# Altium PCB PiMX8MP_r0.3.PcbDoc (part 9 of 10)
Units mm, origin at the board's own origin, x right, y up, seen from the top; angles counter-clockwise.
Board outline 55 x 40 mm, 10 copper layers (Top Layer, Layer 1, Layer 2, Layer 3, Layer 4, Layer 5, Layer 6, Layer 7, Layer 8, Bottom Layer), stack 1.472 mm thick; 545 components, 477 nets, 2606 pads, 2278 vias.
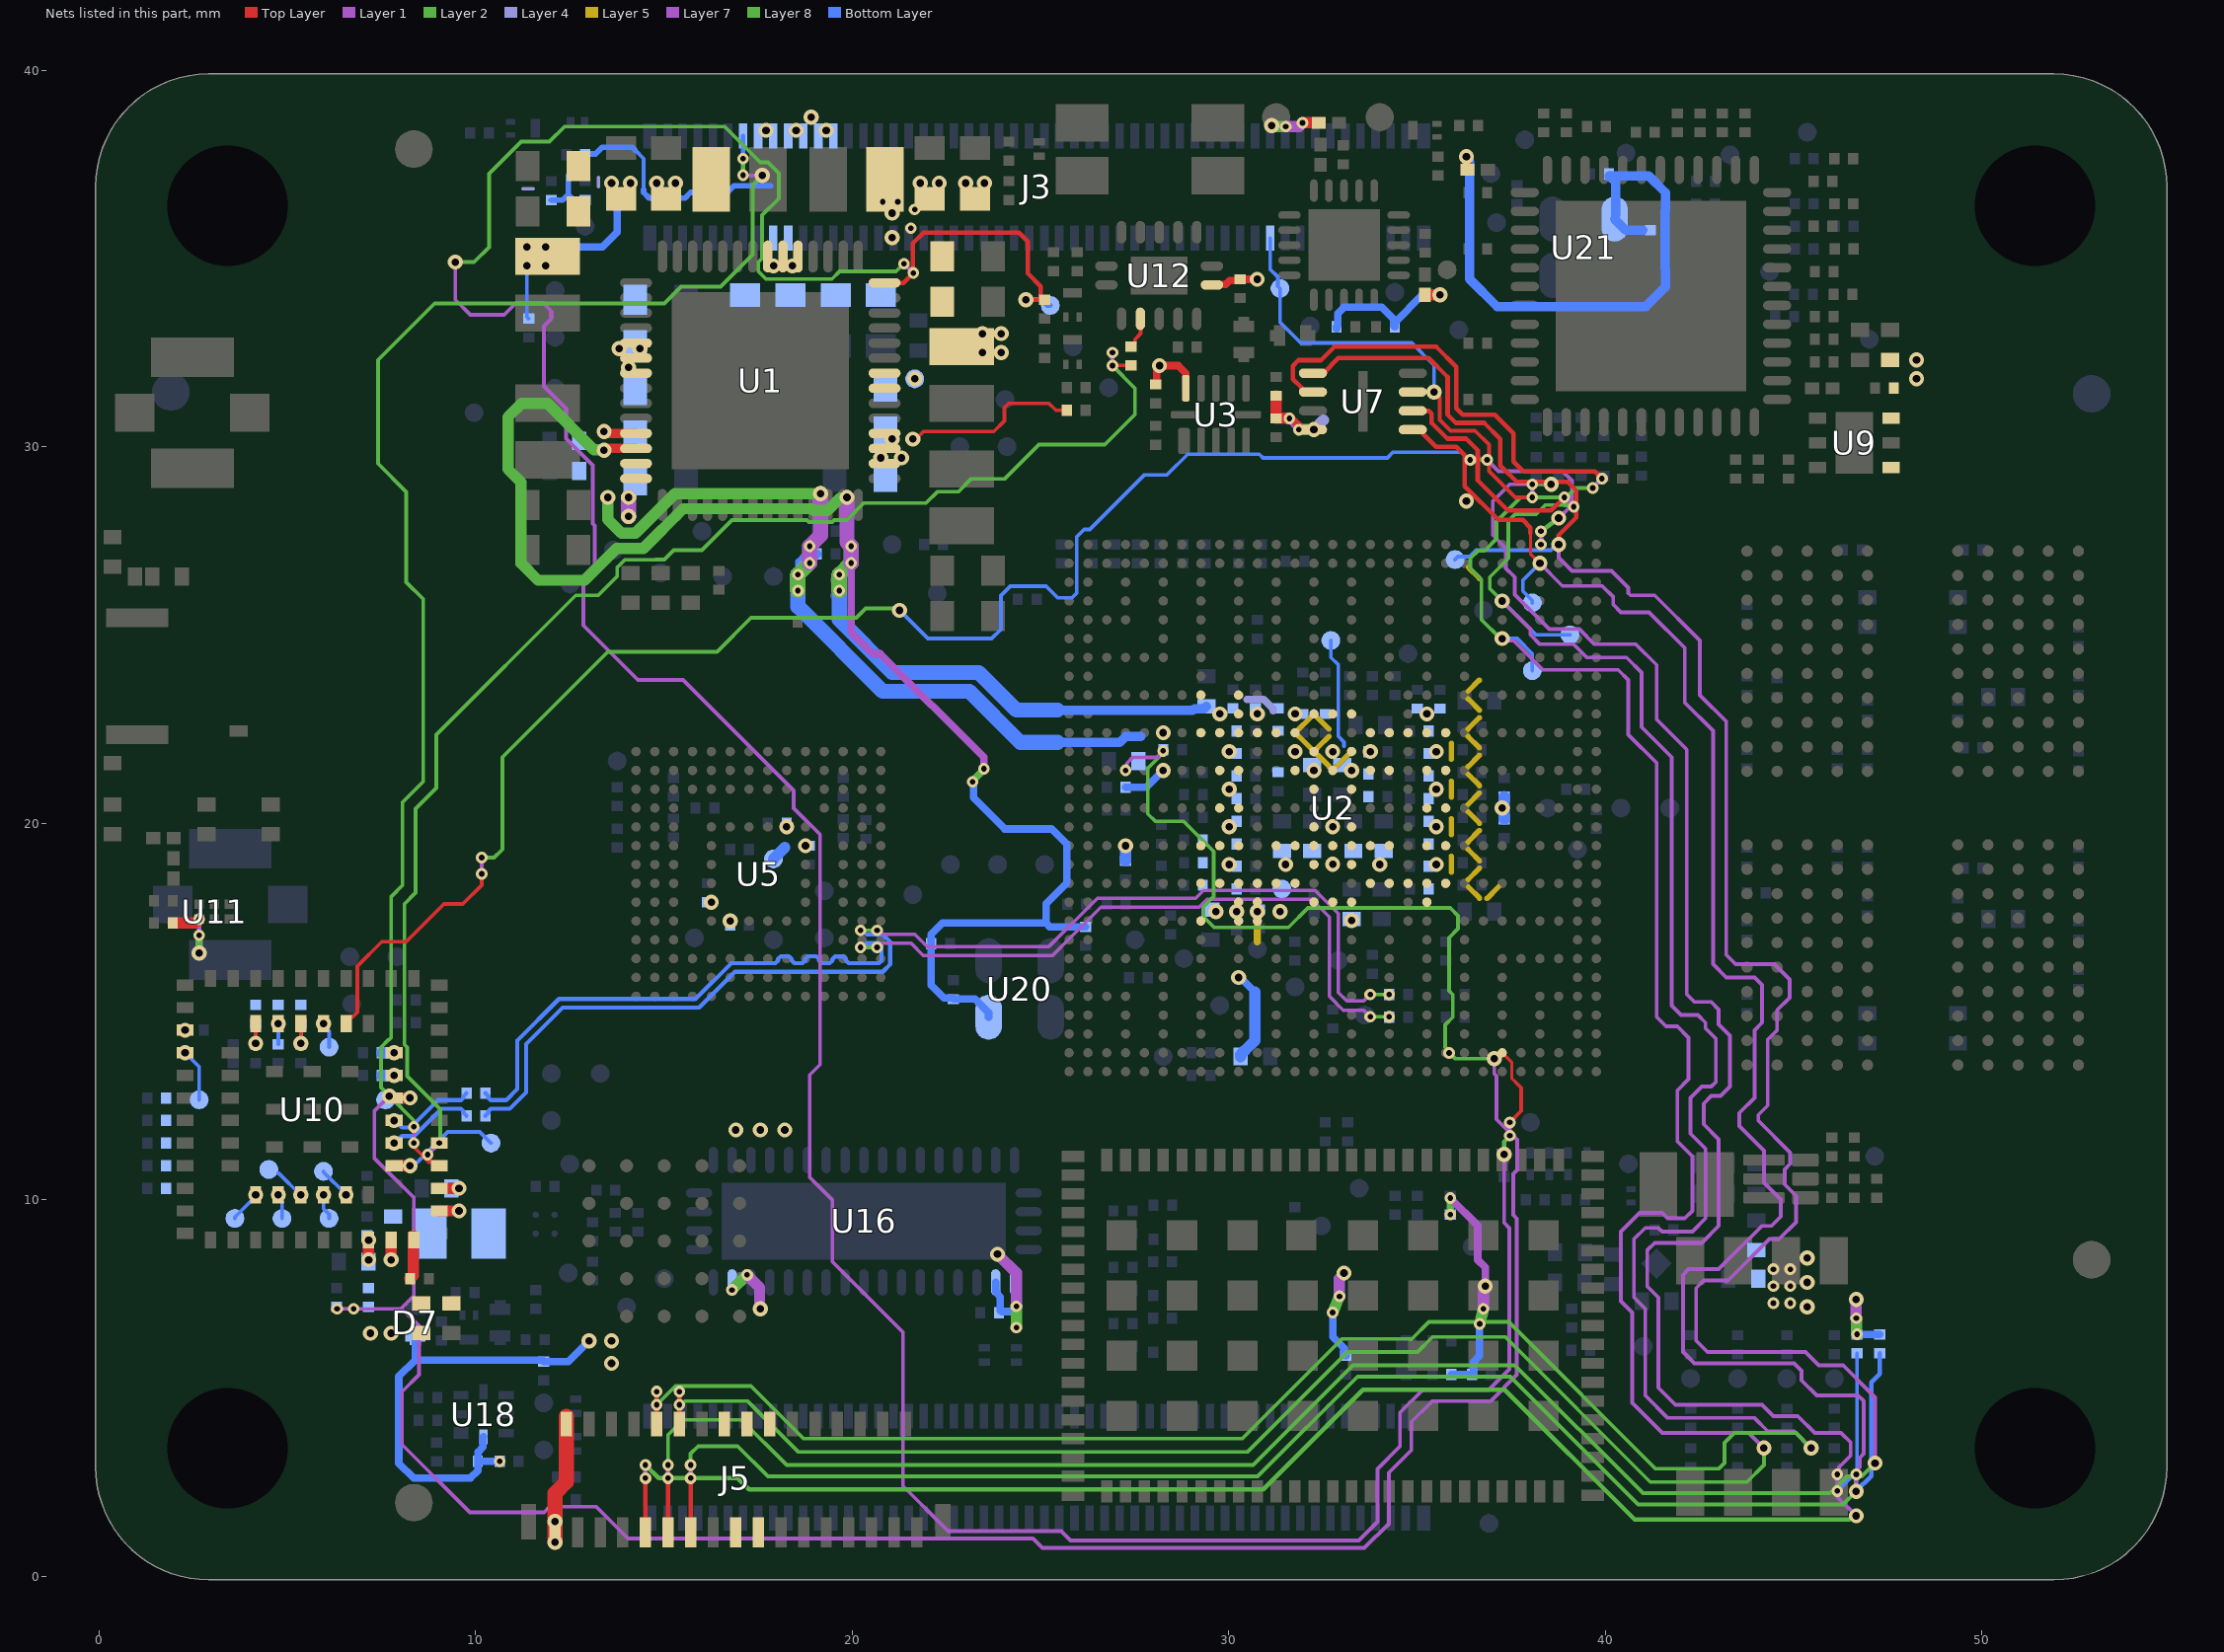
[diagram p17: the nets of this part, all layers, seen from the top]

## Via types
v1: diameter 0.4, hole 0.2, Top Layer to Bottom Layer, tented both sides, 946 vias
v2: diameter 0.31, hole 0.15, Top Layer to Layer 1, tented both sides, 321 vias
v3: diameter 0.31, hole 0.15, Layer 8 to Bottom Layer, tented both sides, 315 vias
v4: diameter 0.31, hole 0.15, Layer 1 to Layer 2, tented both sides, 257 vias
v5: diameter 0.31, hole 0.15, Layer 7 to Layer 8, tented both sides, 198 vias
v6: diameter 0.4, hole 0.2, Layer 2 to Layer 7, tented both sides, 169 vias
v7: diameter 0.31, hole 0.15, Top Layer to Layer 1, tented top, 72 vias

## Nets (pads, with @x,y where several pads share a name; then routed paths per layer and width w, separated by ;. In a path a pad name is that pad's centre, name@x,y a point inside that pad or via, vN(x,y) a via of type N, cw(c..) or ccw(c..) an arc to the next point about the centre after c; other vN are vias at no path point) (continued)
VCC3.3_SYS: C3.1 C4.1 C28.1 C54.1 C55.1 C56.1 C57.1 C105.1 C108.1 C137.1 C138.1 C139.1 C140.1 C148.1 C160.1 C167.1 C175.1 C179.1 C192.1 C195.1 J3.84 J3.86 J5.32 J5.33 L2.2 L7.2 L11.1 L12.1 R37.2 R38.2 R40.1 R62.2 R63.2 R64.2 R80.2 R126.2 R155.1 R162.2 R163.2 R165.2 R175.2 R176.2 R186.1 TP1.TP TP43.TP U1.21 U1.22 U2.J14 U2.U24 U2.Y10 U3.11 U5.E6 U5.F5 U5.J10 U5.K9 U7.8 U9.4 U9.6 U10.3 U10.49 U11.4 U12.14 U16.1 U16.2 U16.16 U21.4 | length 69.7
  Top Layer w0.2: C108.1@28.062,31.654 28.088,31.68 28.088,32.026 28.162,32.1 v1(28.162,32.154) 28.662,32.154 28.862,31.954 U3.11@28.862,31.554 ; U12.14@29.553,34.299 29.562,34.308 29.916,34.308 30.025,34.417 30.271,34.417 C195.1@30.303,34.449 v1(30.756,34.449) ; v2(31.612,30.754) 31.633,30.733 31.695,30.733 31.974,30.454 U7.8@32.237,30.454
  Top Layer w0.25: v1(36.312,37.704) 36.327,37.689 36.327,37.369 L7.2@36.342,37.354
  Top Layer w0.3: C167.1@1.962,17.354 2.562,17.354 v7(2.662,17.454) ; U10.3@9.037,10.304 v1(9.562,10.304) ; R63.2@31.262,31.354 C148.1@31.262,30.754 v2(31.612,30.754) ; v2(31.962,38.604) L12.1@32.392,38.604 ; L11.1@35.212,34.034 v1(35.612,34.034)
  Top Layer w0.4: v1(12.112,0.904) v1(12.112,1.454) 12.112,2.204 12.412,2.504 J5.32@12.412,4.254
  Layer 1 w0.12: v4(2.662,17.022) v7(2.662,17.454)
  Layer 1 w0.2: v2(31.612,30.754) v4(31.862,30.454)
  Layer 1 w0.3: v4(31.512,38.504) 31.514,38.506 31.861,38.506 31.959,38.604 v2(31.962,38.604)
  Layer 2 w0.2: v6(2.662,16.554) v4(2.662,17.022)
  Layer 2 w0.3: v6(31.142,38.53) 31.169,38.53 31.193,38.506 31.51,38.506 v4(31.512,38.504) ; v4(31.862,30.454) v6(32.262,30.454)
  Layer 4 w0.3: v6(32.262,30.454) 32.513,30.705
  Layer 5 w0.14: 31.862,22.309 32.162,22.009 ; 31.862,22.504 31.867,22.504 32.167,22.804 ; 32.357,22.004 32.662,22.309 ; 32.362,21.809 32.662,21.509 ; 32.362,22.799 32.662,22.499 ; 32.857,21.504 33.162,21.809 ; 35.912,18.696 35.912,19.12 ; 35.912,19.696 35.912,20.12 ; 35.912,20.696 35.912,21.12 ; 35.912,21.696 35.912,22.12 ; 36.357,18.504 36.657,18.804 ; 36.357,19.304 36.662,18.999 ; 36.357,19.504 36.657,19.804 ; 36.357,20.304 36.662,19.999 ; 36.357,20.504 36.657,20.804 ; 36.357,21.304 36.662,20.999 ; 36.357,21.504 36.657,21.804 ; 36.357,22.304 36.662,21.999 ; 36.357,22.504 36.657,22.804 ; 36.357,23.304 36.662,22.999 ; 36.357,23.504 36.657,23.804 ; 36.362,18.309 36.662,18.009 ; 36.362,26.799 36.662,26.499 ; 36.857,18.004 37.162,18.309
  Layer 5 w0.3: v1(33.262,17.414) v1@33.289,17.414
  Layer 7 w0.2: v5(35.887,10.044) 36.612,9.319 36.612,8.404 36.812,8.204 v6(36.812,7.704)
  Layer 7 w0.3: v5(17.212,8.004) 17.212,8.002 17.543,7.671 17.543,7.124 v6(17.562,7.104) ; v6(23.862,8.554) 24.362,8.054 v5(24.362,7.17) ; v5@32.941,7.463 32.941,7.906 33.062,8.027 v6(33.062,8.054) ; v5@36.762,7.134 36.762,7.627 36.812,7.677 v6(36.812,7.704) ; v5(46.662,6.854) v6(46.662,7.354)
  Layer 8 w0.2: v3(35.887,9.604) v5(35.887,10.044)
  Layer 8 w0.3: v3(16.812,7.604) v5(17.212,8.004) ; v3(24.362,6.604) v5(24.362,7.17) ; v3(32.762,7.004) v5(32.941,7.433) ; v3(36.662,6.704) v5(36.762,7.104) ; v5(46.662,6.854) 46.674,6.843 46.674,6.441 v3(46.686,6.429)
  Bottom Layer w0.1: 14.237,37.879 14.462,37.654 14.462,37.23 ; 14.462,36.824 14.462,37.229
  Bottom Layer w0.15: R176.2@12.012,36.554 12.312,36.554 12.462,36.704 ; R175.2@12.912,36.554 12.612,36.554 12.462,36.704 ; 14.237,37.879 14.162,37.954 13.362,37.954 13.184,37.777 12.934,37.777 R155.1@12.912,37.754 12.852,37.694 12.852,37.594 12.462,37.204 12.462,36.704 ; 14.462,36.824 14.462,36.754 14.612,36.604 15.562,36.604 15.712,36.754 16.687,36.754 16.862,36.929 17.837,36.929
  Bottom Layer w0.2: U16.2@23.812,7.804 23.812,7.566 23.837,7.541 23.837,7.519 23.935,7.421 C192.1@23.935,7.05 ; C192.1@23.951,7.066 23.987,7.029 24.362,7.029 ; U16.1@24.312,7.804 24.312,7.354 24.362,7.304 24.362,7.029 ; v3(24.362,6.604) 24.362,7.029 ; C56.1@27.262,20.954 27.812,20.954 v1(28.262,21.404) ; v3(32.762,7.004) 32.762,6.354 33.062,6.054 33.062,5.889 33.097,5.854 R163.2@33.112,5.854 ; R37.2@32.863,33.129 32.862,33.13 R37.2@32.862,33.179 32.897,33.214 32.897,33.539 33.062,33.704 34.062,33.704 34.377,33.389 R38.2@34.377,33.214 ; R38.2@34.412,33.179 34.412,33.304 35.142,34.034 v1(35.612,34.034) ; R162.2@35.912,5.354 R165.2@36.462,5.354 36.497,5.389 36.497,5.689 36.662,5.854 v3(36.662,6.704) ; R64.2@46.686,6.425 R62.2@47.286,6.425
  Bottom Layer w0.25: v1(36.312,37.704) 36.312,37.664 36.4,37.576 36.4,34.45 37.13,33.72 41.07,33.72 41.6,34.25 41.6,34.733 41.587,34.746 41.587,36.263 41.6,36.276 41.6,36.75 41.15,37.2 40.1,37.2 40.1,37.185 40.11,37.175 40.125,37.175 40.275,37.025 U21.4@40.275,36.15 ; U21.4@40.247,36.05 40.547,35.75 41,35.75
  Bottom Layer w0.3: C175.1@7.512,13.304 v1(7.837,13.304) ; TP43.TP@17.912,19.054 18.212,19.354 ; R64.2@46.686,6.425 v3(46.686,6.429)
  other v1: 7.212,6.454 7.762,6.454 16.762,17.404 16.262,17.904 18.762,19.404 18.262,19.904 35.262,22.904 21.662,31.804 48.262,31.804 48.262,32.304 23.462,32.504 23.962,32.504 23.462,33.004 23.962,33.004
  other v3: 20.812,36.504 21.212,36.504
  other v5: 21.562,35.804 21.662,36.304
  other v6: 16.912,11.854 17.562,11.854 18.212,11.854 36.312,28.554 21.062,35.554 21.062,36.204
VCC5.0_SYS: C5.1 C6.1 C7.1 C12.1 C13.1 C14.1 C19.1 C20.1 C21.1 C25.1 C26.1 C196.1 D7.2 J3.77 J3.79 J3.81 J3.83 J3.85 J3.87 J5.14 J5.15 J5.16 J5.17 J5.18 R129.1 R133.1 R156.2 R169.2 R170.2 U1.16 U1.17 U1.18 U1.33 U1.34 U1.35 U1.47 U1.48 U1.49 U1.53 U1.56 U18.8 | length 19
  Top Layer w0.1: v1(21.612,30.204) 21.693,30.204 21.893,30.404 23.762,30.404 24.044,30.687 24.044,31.037 24.162,31.154 25.226,31.154 25.412,30.969 R156.2@25.703,30.969
  Top Layer w0.25: v1(13.412,30.404) 13.453,30.404 13.503,30.354 U1.53@14.262,30.354
  Layer 1 w0.4: v1(14.062,28.154) v1(14.062,28.654)
  Layer 4 w0.1: 11.267,36.854 11.532,36.854 ; 13.262,36.909 13.262,37.149
  Bottom Layer w0.2: D7.2@8.402,6.384 8.402,5.744 ; U18.8@10.212,3.704 10.202,3.694 10.202,3.434 10.062,3.294 C196.1@10.062,3.054 ; R170.2@10.612,3.024 v3(10.642,3.054) C196.1@10.062,3.054 ; v1(13.012,6.254) 12.462,5.704 R169.2@11.812,5.704 11.777,5.739 11.65,5.739 11.645,5.744 8.402,5.744 ; 8.402,5.744 7.962,5.304 7.962,3.004 8.362,2.604 9.862,2.604 10.062,2.804 C196.1@10.062,3.054
  other v1: 13.612,5.654 13.612,6.254 20.762,29.704 21.312,29.704 21.062,30.204 14.062,32.104 13.812,32.604 14.362,32.604 17.912,34.804 18.412,34.804 17.712,38.404 18.512,38.404 19.312,38.404 18.912,38.754
  other v3: 44.462,7.254 44.462,7.704 44.462,8.154
  other v5: 44.912,7.254 44.912,7.704 44.912,8.154
  other v6: 45.362,7.154 45.362,7.804 45.362,8.454
VCC_ARM: C1.1 C2.1 C40.1 C41.1 C42.1 C43.1 C44.1 C49.1 C50.1 C51.1 C52.1 C53.1 L1.2 NT1.2 R1.2 TP2.TP U2.T14 U2.T16 U2.U12 U2.U13 U2.U14 U2.U15 U2.U16 U2.U17 U2.V14 U2.V16 U2.W12 U2.W13 U2.W17 U2.Y14 U2.Y15 U2.Y16 | length 5.2
  Layer 4 w0.2: NT1.2@30.482,23.284 30.932,23.284 31.182,23.034 31.182,22.984
  Bottom Layer w0.1: v1(11.362,34.804) 11.362,33.454 R1.2@11.412,33.404 ; TP2.TP@32.712,24.854 32.712,24.404 32.912,24.204 32.912,22.304 33.062,22.154 33.062,22.054
  other v1: 32.262,21.404 33.262,21.404 31.762,21.904 32.762,21.904 33.762,21.904 31.762,22.904 11.862,34.804 11.362,35.304 11.862,35.304
VCC_MIPI_1P2_CAP: C69.1 U2.F20 | length 2.5
  Bottom Layer w0.2: v1(30.262,15.904) 30.3,15.904 30.692,15.512
  Bottom Layer w0.3: C69.1@30.312,13.804 30.312,13.854 30.432,13.974 30.44,13.974 30.692,14.226 30.692,15.512
VCC_SD2: C32.1 C58.1 C59.1 R7.2 U1.55 U2.W24 | length 22.5
  Layer 2 w0.3: v1(13.512,28.654) 13.512,28.068 13.876,27.704 14.249,27.704 15.299,28.754 v6(19.162,28.754)
  Layer 7 w0.4: v5(18.873,26.916) v5(18.873,27.356) 19.162,27.644 v6(19.162,28.754)
  Layer 8 w0.4: v3(18.562,26.179) v3(18.562,26.604) v5(18.873,26.916) v5(18.873,27.356)
  Bottom Layer w0.15: v3(18.562,26.604) 18.562,26.954 18.762,27.154 R7.2@19.062,27.154
  Bottom Layer w0.25: R7.2@19.062,27.139 R7.2@19.062,27.154 ; 25.462,22.149 27.107,22.149 27.262,22.304 27.662,22.304
  Bottom Layer w0.4: v3(18.562,26.604) v3(18.562,26.179) 18.562,25.754 20.812,23.504 23.112,23.504 24.467,22.149 25.462,22.149
  other v1: 28.262,22.404
VCC_SNVS_0P8_CAP: C71.1 U2.N26 | length 0.4
  Bottom Layer w0.3: C71.1@27.262,19.004 v1(27.262,19.404)
VCC_SOC: C8.1 C9.1 C15.1 C16.1 C60.1 C61.1 C62.1 C63.1 C64.1 C65.1 C66.1 C67.1 C73.1 C74.1 C75.1 C76.1 C82.1 C83.1 C84.1 C85.1 C96.1 C97.1 C98.1 C99.1 L3.2 L5.2 NT2.2 R2.2 TP5.TP U2.K10 U2.K14 U2.K15 U2.K16 U2.L9 U2.L10 U2.L11 U2.L12 U2.L13 U2.L17 U2.L18 U2.L19 U2.L20 U2.L21 U2.M14 U2.M16 U2.N9 U2.N10 U2.N12 U2.N13 U2.N14 U2.N15 U2.N16 U2.N17 U2.N18 U2.N20 U2.N21 U2.P14 U2.P16 U2.R9 U2.R10 U2.R20 U2.R21 U2.U9 U2.U10 U2.U20 U2.U21 U2.W9 U2.W10 U2.W11 U2.W20 U2.W21 U2.W22 | length 3.3
  Layer 5 w0.2: NT2.2@30.762,16.854 30.762,17.254
  Bottom Layer w0.2: R2.2@12.412,35.304 12.417,35.309 13.367,35.309 13.762,35.704 13.762,36.558 13.651,36.67 13.651,36.966 v1(13.612,37.004)
  other v1: 31.362,17.654 30.012,18.904 31.512,18.904 32.762,18.914 34.012,18.904 35.512,18.904 30.012,19.904 32.762,19.904 35.512,19.904 30.012,20.904 35.512,20.904 30.012,21.904 35.512,21.904 14.112,37.004 14.812,37.004 15.312,37.004 21.812,37.004 22.312,37.004 23.012,37.004 23.512,37.004
VCCA1.8_SYS: C29.1 C30.1 C70.1 C77.1 C78.1 C79.1 C80.1 C81.1 C86.1 C87.1 C88.1 C89.1 C90.1 R9.2 R112.2 U1.54 U2.AA20 U2.AA22 U2.J19 U2.J20 U2.J22 U2.K19 U2.K20 U2.L22 U2.N22 U2.R6 U2.W18 U2.W19 U2.Y19 U2.Y20 U20.4 | length 54.4
  Top Layer w0.25: v1(13.412,29.904) 13.453,29.904 13.503,29.954 U1.54@14.262,29.954
  Layer 2 w0.3: v1(13.412,29.904) 13.393,29.924 13.143,29.924 11.912,31.154 11.226,31.154 10.862,30.791 10.862,29.404 11.212,29.054 11.212,26.904 11.662,26.454 12.899,26.454 13.744,27.299 14.457,27.299 15.512,28.354 18.926,28.354 18.976,28.304 19.349,28.304 19.679,28.635 19.843,28.635 v6(19.862,28.654)
  Layer 7 w0.2: v5(19.973,26.916) 19.973,25.077 20.55,24.5 20.75,24.5 23.5,21.75 v5(23.5,21.45)
  Layer 7 w0.4: v6(19.862,28.654) 19.862,27.467 v5(19.973,27.356) v5(19.973,26.916)
  Layer 8 w0.2: v3(23.2,21.1) 23.2,21.125 23.5,21.425 v5(23.5,21.45)
  Layer 8 w0.4: v3(19.662,26.179) v3(19.662,26.604) v5(19.973,26.916) v5(19.973,27.356)
  Bottom Layer w0.2: v3(23.2,21.1) 23.221,21.079 23.221,20.679 24.05,19.85 25.3,19.85 25.7,19.45 25.7,18.41 25.15,17.86 25.15,17.35 ; U20.4@23.625,14.85 23.625,14.965 23.26,15.329 C30.1@22.691,15.329 22.656,15.364 22.436,15.364 22.1,15.7 R112.2@22.1,16.8 22.1,17.05 22.4,17.35 25.15,17.35 ; R9.2@26.2,17.25 25.462,17.25 25.25,17.25 25.15,17.35
  Bottom Layer w0.25: 25.462,23.004 26.412,23.004 26.417,22.999 29.047,22.999 29.092,23.044 29.347,23.044 C90.1@29.412,23.109
  Bottom Layer w0.3: C77.1@37.312,20.104 C70.1@37.312,20.704
  Bottom Layer w0.4: v3(19.662,26.604) v3(19.662,26.179) 19.662,25.404 21.062,24.004 23.362,24.004 24.362,23.004 25.462,23.004
  other v1: 29.662,17.654 30.212,17.654 30.762,17.654 37.262,20.404 29.762,22.904 30.762,22.904
VSNOR_SPI_MISO: J5.24 TP50.TP U2.AF6 U7.2 | length 81.5
  Top Layer w0.12: J5.24@14.812,4.046 v2(14.812,4.904) ; U7.2@34.887,30.954 35.312,30.954 35.392,30.874 35.392,30.624 35.802,30.214 36.302,30.214 36.612,29.904 36.612,29.104 37.412,28.304 38.562,28.304 v2(38.912,28.654)
  Layer 1 w0.12: v4(14.812,4.554) v2(14.812,4.904) ; v2(38.912,28.654) v4(39.16,28.407)
  Layer 2 w0.1: v4(14.812,4.554) 15.112,4.854 15.312,5.054 17.312,5.054 18.712,3.654 30.357,3.654 33.007,6.304 34.862,6.304 35.312,6.754 37.439,6.754 41.339,2.854 43.012,2.854 43.167,3.009 43.167,3.545 43.427,3.804 45.062,3.804 v6(45.462,3.404) ; v1(37.262,25.904) 36.932,26.234 36.932,26.541 37.427,27.036 37.427,28.031 37.606,28.209 38.162,28.209 38.407,28.454 38.907,28.454 38.914,28.447 39.12,28.447 v4(39.16,28.407)
  Layer 7 w0.1: v1@37.262,25.938 v1(37.262,25.904) 38.012,25.154 38.012,25.004 38.262,24.754 39.162,24.754 39.512,24.404 40.562,24.404 40.962,24.004 40.962,22.554 41.762,21.754 41.762,15.154 42.012,14.904 42.462,14.904 42.662,14.704 42.662,14.549 42.935,14.277 42.935,13.127 42.812,13.004 42.562,13.004 42.262,12.704 42.262,11.754 42.662,11.354 42.662,9.504 42.312,9.154 41.512,9.154 41.412,9.254 41.062,9.254 40.762,8.954 40.762,7.404 41.062,7.104 41.062,4.804 41.662,4.204 43.962,4.204 44.312,3.854 45.012,3.854 v6(45.462,3.404)
  Bottom Layer w0.1: v1(37.262,25.904) 38.162,25.004 TP50.TP@39.062,25.004
VSNOR_SPI_MOSI: J5.23 TP51.TP U2.AJ3 U7.5 | length 87.2
  Top Layer w0.12: J5.23@15.112,1.171 v2(15.112,2.604) ; U7.5@32.237,31.954 32.512,31.954 32.912,32.354 35.312,32.354 35.812,31.854 35.812,31.605 35.814,31.604 35.814,31.305 35.812,31.304 35.812,30.854 36.032,30.634 36.782,30.634 37.212,30.204 37.212,29.504 37.647,29.069 38.997,29.069 39.227,28.839 39.227,28.119 38.762,27.654 v1(38.762,27.404)
  Layer 1 w0.12: v2(15.112,2.604) v4(15.112,2.954)
  Layer 2 w0.1: v4(15.112,2.954) 15.112,3.754 15.512,4.154 17.062,4.154 18.262,2.954 30.647,2.954 33.297,5.604 37.599,5.604 40.999,2.204 45.962,2.204 46.412,2.654 46.812,2.654 v6(47.162,3.004)
  Layer 7 w0.1: v1(38.762,27.404) 38.762,27.054 39.112,26.704 40.162,26.704 40.612,26.254 40.612,26.113 40.671,26.054 41.312,26.054 42.512,24.854 42.512,23.404 43.212,22.704 43.212,16.504 43.462,16.254 44.492,16.254 44.892,15.854 44.892,15.364 44.562,15.034 44.562,14.504 44.312,14.254 44.312,12.504 44.062,12.254 44.062,12.104 44.912,11.254 44.912,10.954 44.762,10.804 44.762,10.404 45.062,10.104 45.062,9.404 44.612,8.954 44.362,8.954 43.262,7.854 42.612,7.854 42.412,7.654 42.412,6.254 42.712,5.954 45.312,5.954 45.667,5.6 46.317,5.6 47.162,4.754 v6(47.162,3.004)
  Bottom Layer w0.1: TP51.TP@36.012,27.004 36.089,27.081 36.397,27.081 36.57,27.254 38.554,27.254 38.704,27.404 v1(38.762,27.404)
VSNOR_SPI_SCLK: J5.22 TP52.TP U2.AD6 U7.6 | length 84.6
  Top Layer w0.12: J5.22@15.412,4.046 v2(15.412,4.904) ; U7.6@32.237,31.454 32.022,31.454 31.922,31.555 31.922,31.578 31.702,31.798 31.702,32.152 31.85,32.3 32.45,32.3 32.8,32.65 ; 32.8,32.654 35.512,32.654 36.047,32.119 36.047,31.019 36.212,30.854 37.062,30.854 37.562,30.354 37.562,29.604 37.822,29.344 39.722,29.344 v2(39.912,29.154)
  Layer 1 w0.12: v4(15.412,4.554) v2(15.412,4.904) ; v4(39.665,28.907) v2(39.912,29.154)
  Layer 2 w0.1: v4(15.412,4.554) 15.469,4.554 15.569,4.654 17.212,4.654 18.562,3.304 30.502,3.304 33.152,5.954 35.012,5.954 35.412,6.354 37.344,6.354 41.194,2.504 43.762,2.504 44.212,2.954 v6(44.212,3.404) ; v1(37.262,24.904) 37.212,24.904 36.712,25.404 36.712,26.474 36.412,26.774 36.412,27.035 36.621,27.244 36.802,27.244 37.112,27.554 37.112,28.011 37.756,28.654 38.962,28.654 39.215,28.907 v4(39.665,28.907)
  Layer 7 w0.1: v1(37.262,24.904) 37.32,24.847 37.57,24.847 38.342,24.074 40.342,24.074 40.612,23.804 40.612,22.354 41.362,21.604 41.362,14.854 41.612,14.604 41.912,14.604 42.212,14.304 42.212,13.204 41.912,12.904 41.912,11.554 42.312,11.154 42.312,9.704 42.112,9.504 41.662,9.504 41.512,9.654 40.912,9.654 40.412,9.154 40.412,7.304 40.712,7.004 40.712,4.604 41.512,3.804 43.812,3.804 v6(44.212,3.404)
  Bottom Layer w0.1: v1(37.262,24.904) 37.662,24.904 38.062,24.504 TP52.TP@38.062,24.054
VSNOR_SPI_SS0: J5.21 R62.1 TP53.TP U2.AH4 U7.1 | length 82.8
  Top Layer w0.08: 38.012,27.704 38.012,27.154 v1(38.262,26.904)
  Top Layer w0.12: J5.21@15.712,1.171 v2(15.712,2.604) ; U7.1@34.887,30.454 35.048,30.454 35.108,30.394 35.162,30.394 35.162,30.34 35.508,29.994 36.04,29.994 36.262,29.772 36.262,28.954 37.162,28.054 37.812,28.054 38.012,27.854 38.012,27.704
  Layer 1 w0.12: v2(15.712,2.604) v4(15.712,2.954)
  Layer 2 w0.1: v4(15.712,2.954) 15.712,3.254 15.912,3.454 16.962,3.454 17.762,2.654 30.771,2.654 33.421,5.304 37.475,5.304 40.875,1.904 46.312,1.904 v6(46.662,2.254)
  Layer 7 w0.1: v1(38.262,26.904) 38.862,26.304 39.912,26.304 40.212,26.005 40.212,25.804 40.412,25.604 41.162,25.604 42.112,24.654 42.112,23.204 42.862,22.454 42.862,16.254 43.212,15.904 43.962,15.904 44.162,15.704 44.162,14.704 43.962,14.504 43.962,12.704 43.562,12.304 43.562,11.954 44.212,11.304 44.212,10.454 44.662,10.004 44.662,9.554 44.412,9.304 44.162,9.304 43.012,8.154 42.212,8.154 42.062,8.004 42.062,5.954 42.362,5.654 45.012,5.654 45.212,5.454 45.212,5.204 45.612,4.804 46.712,4.804 46.862,4.654 46.862,3.254 46.762,3.154 46.762,2.904 46.662,2.804 v5(46.662,2.704) v6(46.662,2.254)
  Layer 8 w0.12: v3(46.662,2.264) v5(46.662,2.704)
  Bottom Layer w0.1: TP53.TP@38.062,25.854 38.062,25.92 37.812,26.17 37.812,26.454 v1(38.262,26.904)
  Bottom Layer w0.12: v3(46.662,2.264) 47.062,2.664 47.062,5.154 47.286,5.378 R62.1@47.286,5.925
VSNOR_SPI_W\P\: J3.20 J5.25 R64.1 TP49.TP U7.3 | length 94
  Top Layer w0.1: U7.3@34.887,31.454 v1(35.454,31.454) 35.602,31.306 35.602,30.714 35.892,30.424 36.542,30.424 36.912,30.054 36.912,29.354 37.612,28.654 v2(38.062,28.654)
  Top Layer w0.12: J5.25@14.512,1.171 v2(14.512,2.604)
  Layer 1 w0.12: v2(14.512,2.604) v4(14.512,2.954) ; v2(38.062,28.654) v4(38.062,29.004)
  Layer 2 w0.1: v4(38.062,29.004) v6(38.562,29.004)
  Layer 2 w0.12: v4(14.512,2.954) 14.862,2.604 16.962,2.604 17.262,2.304 30.916,2.304 33.566,4.954 37.33,4.954 40.78,1.504 46.486,1.504
  Layer 7 w0.1: v6(38.562,29.004) 37.462,29.004 37.012,28.554 37.012,27.654 37.362,27.304 37.362,26.771 37.562,26.571 37.592,26.541 37.592,26.074 38.512,25.154 39.312,25.154 39.712,24.754 40.812,24.754 41.362,24.204 41.362,22.754 42.162,21.954 42.162,15.454 42.362,15.254 42.812,15.254 43.012,15.054 43.012,14.659 43.312,14.359 43.312,13.004 43.062,12.754 42.812,12.754 42.612,12.554 42.612,12.004 43.012,11.604 43.012,9.304 42.562,8.854 41.312,8.854 41.112,8.654 41.112,7.704 41.412,7.404 41.412,5.004 41.862,4.554 44.162,4.554 44.462,4.254 45.112,4.254 45.562,3.804 46.262,3.804 46.512,3.554 46.512,3.204 46.202,2.895 46.202,2.745 v5(46.162,2.704) 46.162,2.104 v6(46.662,1.604)
  Layer 8 w0.1: v3(46.162,2.264) v5(46.162,2.704)
  Bottom Layer w0.1: J3.20@31.102,35.544 31.102,34.714 31.304,34.512 31.304,34.262 TP49.TP@31.362,34.204 31.362,33.304 31.912,32.754 34.862,32.754 35.454,32.163 v1(35.454,31.454) ; v3(46.162,2.264) 46.686,2.788 R64.1@46.686,5.925
WDOG_B: R5.2 TP13.TP U1.28 U2.B6 | length 95.9
  Top Layer w0.08: U2.B6@37.262,13.904 37.512,13.654 37.512,13.231 37.639,13.104
  Top Layer w0.1: v2(37.462,12.054) 37.767,12.359 37.767,12.976 37.639,13.104
  Top Layer w0.12: U1.28@20.862,34.354 21.362,34.354 21.612,34.604 21.612,35.404 21.897,35.689 24.427,35.689 24.662,35.454 24.662,34.604 25.012,34.254 25.012,33.989 R5.2@25.097,33.904 ; v1(24.612,33.904) R5.2@25.097,33.904 ; R5.2@25.112,33.904 R5.2@25.097,33.904
  Layer 1 w0.12: v4(21.376,34.863) v2(21.624,34.616) ; v4(37.462,11.704) v2@37.462,11.954
  Layer 2 w0.1: v6(9.462,34.904) 9.962,34.904 10.362,35.304 10.362,37.254 11.212,38.104 11.962,38.104 12.362,38.504 16.612,38.504 17.562,37.554 17.762,37.554 18.051,37.266 18.051,36.593 17.612,36.154 17.612,35.004 17.512,34.904 17.512,34.654 17.712,34.454 19.462,34.454 19.662,34.654 21.167,34.654 v4(21.376,34.863)
  Layer 2 w0.12: v6(37.312,11.204) 37.312,11.539 37.462,11.689 v4(37.462,11.704)
  Layer 7 w0.1: v6(9.462,34.904) 9.462,33.904 9.862,33.504 10.762,33.504 11.062,33.804 11.812,33.804 12.012,33.604 12.012,33.404 11.812,33.204 11.812,31.604 12.402,31.014 12.402,30.214 13.112,29.504 13.112,27.954 13.162,27.904 13.162,26.859 12.862,26.559 12.862,25.254 14.312,23.804 15.512,23.804 17.162,22.154 18.45,20.867 18.45,20.4 19.15,19.7 19.15,15.154 19.15,13.592 18.872,13.314 18.872,10.594 19.477,9.989 19.477,8.354 21.35,6.482 21.35,2.4 22.55,1.2 25.55,1.2 25.8,0.95 33.45,0.95 33.95,1.45 33.95,2.85 34.55,3.45 34.55,4.35 35.15,4.95 36.9,4.95 37.45,5.5 37.45,9.25 37.312,9.388 v6(37.312,11.204)
  Bottom Layer w0.12: v1(24.612,33.904) 25.009,33.904 25.159,33.754 TP13.TP@25.262,33.754
WIFI_BBPLL: C180.1 U10.44 | length 1.2
  Top Layer w0.3: C180.1@8.262,7.904 8.35,7.992 U10.44@8.35,9.05
WIFI_GPIO_1: TP82.TP U10.45 | length 2.8
  Top Layer w0.3: U10.45@7.837,10.904 v1(8.262,10.904)
  Bottom Layer w0.1: 8.46,11.002 9.262,11.804 10.112,11.804 TP82.TP@10.412,11.504
WIFI_JTAG_SEL: TP75.TP U10.53 | length 0.7
  Bottom Layer w0.1: v1(5.962,14.679) 5.962,14.621 6.112,14.471 TP75.TP@6.112,14.054
WIFI_JTAG_TCK: TP80.TP U10.66 | length 0.7
  Bottom Layer w0.1: v1(5.962,10.129) 5.962,9.763 6.112,9.613 TP80.TP@6.112,9.504
WIFI_JTAG_TDI: TP77.TP U10.64 | length 0.7
  Bottom Layer w0.1: v1(4.762,10.129) 4.762,10.048 4.862,9.948 TP77.TP@4.862,9.504
WIFI_JTAG_TDO: TP78.TP U10.65 | length 0.8
  Bottom Layer w0.1: 4.762,10.704 4.775,10.704 5.35,10.129 v1(5.362,10.129)
WIFI_JTAG_TMS: TP81.TP U10.67 | length 0.9
  Bottom Layer w0.1: TP81.TP@5.962,10.754 5.962,10.742 6.562,10.142 v1(6.562,10.129)
WIFI_JTAG_TRST: TP76.TP U10.63 | length 0.9
  Bottom Layer w0.1: TP76.TP@3.612,9.504 3.612,9.542 4.162,10.092 v1(4.162,10.129)
WIFI_LPO_IN: R116.1 U12.10 | length 0.9
  Top Layer w0.1: R116.1@27.411,32.661 27.426,32.661 27.511,32.746 27.511,32.853 27.662,33.004 27.662,33.389 U12.10@27.653,33.399
WIFI_LPO_IN_R: R116.2 U10.5 | length 37.5
  Top Layer w0.1: v2(26.912,32.154) 26.919,32.161 R116.2@27.411,32.161
  Layer 1 w0.1: v4(8.731,11.199) v2(9.037,11.504)
  Layer 1 w0.12: v2(26.912,32.154) v4(26.912,32.504)
  Layer 2 w0.1: v4(8.731,11.199) 9.062,11.529 9.062,12.404 8.187,13.279 8.187,14.049 8.112,14.124 8.112,17.854 8.412,18.154 8.412,20.384 8.962,20.934 8.962,22.354 12.662,26.054 13.262,26.054 13.762,26.554 13.762,26.794 13.967,26.999 14.781,26.999 14.786,27.004 15.012,27.004 15.262,27.254 16.012,27.254 16.812,28.054 18.802,28.054 18.852,28.004 19.473,28.004 19.523,28.054 19.862,28.054 20.312,28.504 21.962,28.504 22.262,28.804 22.817,28.804 23.162,29.149 24.057,29.149 24.962,30.054 26.712,30.054 27.512,30.854 27.512,31.554 v2(26.912,32.154) v4(26.912,32.504)
WIFI_STRAP_0: R119.1 R123.2 U10.56 | length 1.1
  Top Layer w0.1: v1(4.162,14.154) U10.56@4.162,14.679
  Bottom Layer w0.1: v1(4.162,14.154) R123.2@4.162,14.129 R119.1@4.162,14.679
WIFI_STRAP_1: R120.1 R124.2 U10.54 | length 1.1
  Top Layer w0.1: v1(5.362,14.154) U10.54@5.362,14.679
  Bottom Layer w0.1: v1(5.362,14.154) R124.2@5.362,14.129 R120.1@5.362,14.679
WIFI_STRAP_2: R121.1 R125.2 U10.55 | length 0.6
  Bottom Layer w0.1: R125.2@4.762,14.129 v1(4.762,14.679)
WIFI_SW_CTRL_0: TP83.TP U10.26 | length 1.4
  Bottom Layer w0.1: v1(2.287,13.904) 2.662,13.529 TP83.TP@2.662,12.654
WIFI_SW_CTRL_5: R115.1 U10.25
  other v1: 2.287,14.504
WIFI_USB_MONCDR: TP79.TP U10.48 | length 1.1
  Top Layer w0.3: U10.48@7.837,12.704 v1(8.262,12.704)
  Bottom Layer w0.1: TP79.TP@7.612,12.654 7.662,12.704 v1(8.262,12.704)
WIFI_USB_N: R44.2 R113.1 | length 32.1
  Layer 7 w0.09: v5(20.662,17.154) 20.72,17.154 20.825,17.049 21.667,17.049 21.993,16.724 25.224,16.724 26.51,18.01 29.12,18.01 29.33,18.219 32.297,18.219 32.912,17.604 32.912,15.504 33.14,15.277 33.585,15.277 v5(33.76,15.452)
  Layer 8 w0.1: v3(20.222,17.154) v5(20.662,17.154) ; v5(33.76,15.452) v3@34.26,15.452 ; v3@34.257,15.454 v3@34.26,15.452 ; v3(34.262,15.449) v3@34.26,15.452
  Bottom Layer w0.11: R113.1@10.262,12.229 10.342,12.309 10.342,12.35 10.407,12.414 10.907,12.414 11.342,12.849 11.342,14.134 12.312,15.104 15.937,15.104 16.887,16.054 20.813,16.054 21.012,16.254 21.012,16.845 20.813,17.044 20.386,17.044 20.276,17.154 v3(20.222,17.154)
WIFI_USB_P: R45.2 R114.1 | length 31.9
  Layer 7 w0.09: v5(20.662,16.704) 20.72,16.704 20.825,16.809 21.568,16.809 21.893,16.484 25.324,16.484 26.609,17.77 29.22,17.77 29.429,17.979 32.197,17.979 32.672,17.504 32.672,15.405 33.04,15.037 33.585,15.037 v5(33.76,14.862)
  Layer 8 w0.1: v3(20.222,16.704) v5(20.662,16.704) ; v5(33.76,14.862) v3@34.26,14.862
  Bottom Layer w0.11: R114.1@10.262,12.829 10.342,12.749 10.342,12.709 10.407,12.644 10.812,12.644 11.112,12.944 11.112,14.23 12.217,15.334 15.842,15.334 16.792,16.284 17.909,16.284 17.964,16.284 18.036,16.356 18.036,16.397 18.108,16.469 18.324,16.469 18.396,16.397 18.396,16.356 18.468,16.284 18.684,16.284 18.756,16.356 18.756,16.397 18.828,16.469 19.044,16.469 19.116,16.397 19.116,16.356 19.188,16.284 19.404,16.284 19.476,16.356 19.476,16.388 19.548,16.46 19.764,16.46 19.836,16.388 19.836,16.356 19.908,16.284 20.112,16.284 20.718,16.284 20.782,16.349 20.782,16.75 20.718,16.814 20.386,16.814 20.276,16.704 v3(20.222,16.704)
  other v3: 34.262,14.859
WIFI_USB_R_N: R113.2 U10.46 | length 2.4
  Bottom Layer w0.11: v1(7.837,11.504) 7.862,11.504 8.047,11.689 8.372,11.689 9.097,12.414 9.618,12.414 9.682,12.35 9.682,12.309 R113.2@9.762,12.229
WIFI_USB_R_P: R114.2 U10.47 | length 2.4
  Bottom Layer w0.11: v1(7.837,12.104) 7.862,12.104 8.047,11.919 8.277,11.919 9.002,12.644 9.618,12.644 9.682,12.709 9.682,12.749 R114.2@9.762,12.829
WIFI_USB_RREF: R117.2 U10.50 | length 0.3
  Bottom Layer w0.3: R117.2@7.512,13.904 v1(7.837,13.904)
WIFI_VCC1.35: C181.1 L9.2 U10.43 | length 0.5
  Top Layer w0.3: v1(7.762,8.404) U10.43@7.762,8.929
WIFI_VCCIO: C178.1 R105.2 R106.2 R107.2 R108.2 R109.2 R110.2 R111.2 R119.2 R120.2 R121.2 R122.1 R126.1 U10.42 | length 0.5
  Top Layer w0.3: v1(7.162,8.404) v1(7.162,8.929)
WIFI_VLX: L9.1 U10.2 | length 0.5
  Top Layer w0.3: U10.2@9.037,9.704 v1(9.562,9.704)
WIFI_WL_HOST_WAKE: U2.AJ4 U10.52 | length 46.3
  Top Layer w0.1: U10.52@6.562,14.679 6.562,14.754 6.662,14.854 6.737,14.854 6.862,14.979 6.862,16.204 7.512,16.854 8.162,16.854 9.162,17.854 9.662,17.854 10.162,18.354 v2(10.162,18.654)
  Layer 1 w0.1: v2(10.162,18.654) v4(10.162,19.087)
  Layer 1 w0.12: v2(38.292,27.404) v4(38.292,27.754)
  Layer 2 w0.1: v4(10.162,19.087) 10.495,19.087 10.712,19.304 10.712,21.754 13.512,24.554 16.412,24.554 17.312,25.454 20.112,25.454 20.362,25.704 21.212,25.704 v1(21.262,25.654)
  Layer 2 w0.12: v4(38.292,27.754) v6(38.762,28.104)
  Layer 7 w0.1: v5(36.862,29.654) 37.162,29.354 38.862,29.354 39.112,29.104 39.112,28.454 v6(38.762,28.104)
  Layer 8 w0.12: v3(36.412,29.654) v5(36.862,29.654)
  Bottom Layer w0.1: v1(21.262,25.654) 22.012,24.904 22.762,24.904 23.704,24.904 23.95,25.15 23.95,26.05 24.2,26.3 25.15,26.3 25.462,25.988 25.838,25.988 25.962,26.112 25.962,27.604 26.162,27.804 26.312,27.804 27.762,29.254 28.362,29.254 28.912,29.804 30.812,29.804 30.912,29.704 34.212,29.704 34.362,29.854 36.181,29.854 36.381,29.654 v3(36.412,29.654)
WL_REG_EN: C176.1 J3.89 R105.1 U2.U26 U10.4 | length 112.5
  Top Layer w0.1: v2@8.402,11.364 8.762,11.004 8.937,11.004 U10.4@9.037,10.904
  Layer 1 w0.1: v2(8.362,11.504) v4(8.362,11.937) ; v2(27.262,21.404) 27.299,21.441 27.299,21.599 27.45,21.75 28.094,21.75 v4@28.244,21.9
  Layer 2 w0.09: 8.351,12.115 8.351,11.948 v4(8.362,11.937)
  Layer 2 w0.1: 8.351,12.115 v6(7.712,12.754) 7.487,12.979 7.487,14.049 7.692,14.254 7.704,14.254 7.762,14.313 7.762,18.054 8.062,18.354 8.062,20.554 8.612,21.104 8.612,25.954 8.162,26.404 8.162,28.804 7.412,29.554 7.412,32.304 8.912,33.804 15.012,33.804 15.462,34.254 16.512,34.254 17.362,35.104 17.362,36.954 v6(17.612,37.204) ; v4(28.257,21.923) 28.257,21.866 27.85,21.459 27.85,20.25 28.05,20.05 28.803,20.05 29.6,19.253 29.6,18.059 29.332,17.791 29.332,17.518 29.616,17.234 31.584,17.234 32.1,17.75 35.883,17.75 36.092,17.541 36.092,17.201 35.85,16.959 35.85,15.55 35.95,15.45 35.95,14.85 35.75,14.65 35.75,14.057 35.85,13.957 v4(35.85,13.9) 35.864,13.9 36.014,13.75 v6@37,13.75
  Layer 7 w0.1: v5(6.322,7.104) 8.012,7.104 8.362,7.454 8.362,10.054 7.312,11.104 7.312,12.354 v6(7.712,12.754) ; 8.05,7.1 8.5,6.65 8.5,5.35 8.05,4.9 8.05,3.5 9.85,1.7 11.824,1.7 11.974,1.85 13.2,1.85 14.05,1 24.8,1 25.05,0.75 33.6,0.75 34.25,1.4 34.25,2.75 34.85,3.35 34.85,4.1 35.4,4.65 36.95,4.65 37.65,5.35 37.65,9.5 37.552,9.598 37.552,10.685 37.662,10.795 37.662,11.588 37.112,12.138 37.112,13.288 37.05,13.35 v6(37.05,13.75) ; v5(17.102,37.214) 17.107,37.209 17.607,37.209 v6(17.612,37.204)
  Layer 8 w0.1: v5(6.322,7.104) v3(6.762,7.104)
  Layer 8 w0.12: v5(17.102,37.214) v3(17.102,37.654)
  Bottom Layer w0.12: v3(17.102,37.654) J3.89@17.102,38.254
pads on no net: J4.4 J4.6 J4.11 J4.43 J4.45 J4.46 J4.47 J4.48 J4.49 J4.52 J4.54 J4.57 J4.58 J4.59 J4.60 J4.63 J4.64 J4.65 J4.66 J4.69 J4.71 J6.3 U1.11 U1.24 U1.25 U1.26 U1.27 U2.A6 U2.A9 U2.A10 U2.A21 U2.A22 U2.A26 U2.A27 U2.A28 U2.AC4 U2.AC5 U2.AC10 U2.AC12 U2.AC26 U2.AD16 U2.AE12 U2.AE14 U2.AF10 U2.AF16 U2.AF18 U2.AH6 U2.AH8 U2.AH15 U2.AH18 U2.AH22 U2.AH23 U2.AJ9 U2.AJ13 U2.AJ16 U2.AJ18 U2.AJ19 U2.AJ23 U2.B8 U2.B9 U2.B10 U2.B11 U2.B21 U2.B22 U2.B26 U2.B27 U2.B28 U2.B29 U2.C28 U2.C29 U2.D8 U2.D28 U2.E12 U2.F24 U2.G4 U2.J5 U2.L5 U2.N1 U2.N2 U2.P1 U2.R4 U2.R5 U2.T2 U2.U1 U2.U2 U2.W6 U4.A1 U4.A2 U4.A11 U4.A12 U4.AA1 U4.AA12 U4.AB1 U4.AB2 U4.AB11 U4.AB12 U4.B1 U4.B12 U4.G11 U4.K5 U4.K8 U4.N5 U4.N8 U5.A1 U5.A2 U5.A7 U5.A8 U5.A9 U5.A10 U5.A11 U5.A12 U5.A13 U5.A14 U5.B1 U5.B7 U5.B8 U5.B9 U5.B10 U5.B11 U5.B12 U5.B13 U5.B14 U5.C1 U5.C3 U5.C5 U5.C7 U5.C8 U5.C9 U5.C10 U5.C11 U5.C12 U5.C13 U5.C14 U5.D1 U5.D2 U5.D3 U5.D4 U5.D12 U5.D13 U5.D14 U5.E1 U5.E2 U5.E3 U5.E5 U5.E8 U5.E12 U5.E13 U5.E14 U5.F1 U5.F2 U5.F3 U5.F12 U5.F13 U5.F14 U5.G1 U5.G2 U5.G3 U5.G10 U5.G12 U5.G13 U5.G14 U5.H1 U5.H2 U5.H3 U5.H12 U5.H13 U5.H14 U5.J1 U5.J2 U5.J3 U5.J12 U5.J13 U5.J14 U5.K1 U5.K2 U5.K3 U5.K6 U5.K7 U5.K12 U5.K13 U5.K14 U5.L1 U5.L2 U5.L3 U5.L12 U5.L13 U5.L14 U5.M1 U5.M2 U5.M3 U5.M7 U5.M8 U5.M9 U5.M10 U5.M11 U5.M12 U5.M13 U5.M14 U5.N1 U5.N3 U5.N6 U5.N7 U5.N8 U5.N9 U5.N10 U5.N11 U5.N12 U5.N13 U5.N14 U5.P1 U5.P2 U5.P7 U5.P8 U5.P9 U5.P10 U5.P11 U5.P12 U5.P13 U5.P14 U6.A2 U6.A3 U6.A5 U6.B1 U6.B5 U6.C1 U6.C3 U6.C5 U6.D1 U6.D5 U6.E1 U6.E2 U6.E3 U6.E4 U6.E5 U8.44 U8.45 U9.2 U9.5 U10.15 U10.35 U10.36 U10.37 U10.38 U10.39 U10.40 U10.59 U10.60 U12.8 U13.13 U13.14 U13.49 U13.50 U13.52 U13.83 U13.84 U13.85 U16.3 U16.4 U16.9 U16.30 U16.39 U16.40 U16.41 U16.42 U17.2 U17.4 U17.5 U17.6 U17.7 U17.8 U17.13 U17.14 U17.15 U17.20

## Polygon pours and split planes (outlines as drawn)
GND on Layer 8 "GND_L09_P075" (solid, remove dead copper, pour order 75): 3.412,6.604 1.362,6.604 cw(c1.362,7.804) 0.162,7.804 0.162,19.704 cw(c0.362,19.704) 0.362,19.904 5.912,19.904 5.912,27.404 0.362,27.404 cw(c0.362,27.604) 0.162,27.604 0.162,32.004 cw(c1.362,32.004) 1.362,33.204 3.412,33.204 ccw(c3.412,36.404) 6.612,36.404 6.612,38.454 cw(c7.812,38.454) 7.812,39.654 47.012,39.654 cw(c47.012,38.454) 48.212,38.454 48.212,36.404 ccw(c51.412,36.404) 51.412,33.204 53.462,33.204 cw(c53.462,32.004) 54.662,32.004 54.662,7.804 cw(c53.462,7.804) 53.462,6.604 51.412,6.604 ccw(c51.412,3.404) 48.212,3.404 48.212,1.354 cw(c47.012,1.354) 47.012,0.154 7.812,0.154 cw(c7.812,1.354) 6.612,1.354 6.612,3.404 ccw(c3.412,3.404)
GND on Top Layer "Top Layer-GND" (solid, pour order 81): 19.162,6.154 19.412,5.904 23.662,5.904 23.912,5.654 23.912,5.154 23.662,4.904 23.662,2.654 23.912,2.404 25.212,2.404 25.462,2.154 25.462,1.054 24.962,0.554 24.962,0.154 47.012,0.154 ccw(c47.012,1.154) 48.012,1.154 48.012,3.354 cw(c51.462,3.354) 51.462,6.804 53.462,6.804 ccw(c53.462,7.854) 54.512,7.854 54.512,12.004 54.262,12.004 54.162,11.904 47.862,11.904 47.612,11.654 47.612,9.304 46.812,8.504 46.812,1.504 46.462,1.154 41.812,1.154 41.512,1.454 41.512,7.254 41.462,7.304 39.212,7.304 39.012,7.504 39.012,9.554 38.112,10.454 37.112,10.454 36.912,10.654 36.912,11.654 36.812,11.754 33.162,11.754 33.062,11.654 33.062,10.004 32.962,9.904 31.562,9.904 31.462,10.004 31.462,11.654 31.362,11.754 30.162,11.754 30.062,11.654 30.062,10.004 29.962,9.904 28.062,9.904 27.962,10.004 27.962,11.404 27.862,11.504 25.662,11.504 25.512,11.354 25.512,10.004 25.562,9.954 26.662,9.954 26.662,8.854 25.162,8.854 24.962,8.654 19.412,8.654 19.162,8.404
GND on Top Layer "GND_L01_P018" (solid, pour order 18): 0.562,12.654 0.912,13.004 2.662,13.004 2.912,12.754 2.912,10.754 3.162,10.504 7.162,10.504 7.412,10.754 7.412,13.504 6.762,14.154 6.762,16.104 10.162,19.504 10.162,24.154 10.162,24.804 10.662,25.304 10.662,37.904 10.962,38.204 12.762,38.204 13.212,38.654 13.362,38.804 17.412,38.804 17.762,39.154 19.262,39.154 19.612,38.804 24.712,38.804 25.162,39.254 25.162,39.454 10.162,39.454 7.812,39.454 ccw(c7.812,38.455) 6.812,38.454 6.812,36.404 cw(c3.413,36.404) 3.412,33.004 1.362,33.004 ccw(c1.362,32.004) 0.362,32.004 0.362,27.604 6.112,27.604 6.112,19.904 0.362,19.904 0.362,12.654
GND on Top Layer "GND_L01_P079" (solid, remove dead copper, pour order 79): 3.262,7.001 5.512,7.001 6.862,5.651 9.866,5.651 10.662,4.854 10.662,0.804 10.912,0.554 10.912,0.351 7.819,0.351 cw(c7.819,1.354) 6.816,1.354 6.816,3.247 ccw(c3.262,3.247) 3.262,6.801
VCC_SOC on Top Layer "VCC_SOC_L01_P011" (solid, remove dead copper, pour order 11): 29.012,22.604 29.962,22.604 30.462,22.604 30.462,18.604 31.062,18.604 31.062,19.604 32.062,19.604 32.062,20.104 33.462,20.104 33.462,19.604 34.462,19.604 34.462,18.604 35.062,18.604 35.062,22.204 34.562,22.204 34.562,22.604 35.962,22.604 35.962,17.704 35.062,17.704 35.062,18.204 33.962,18.204 33.962,17.704 31.962,17.704 31.962,17.154 31.062,17.154 31.062,18.204 29.562,18.204 29.562,21.704 29.012,21.704
VCC5.0_SYS on Top Layer "VCC5.0_SYS_L01_P037" (solid, pour order 37): 15.912,5.404 16.412,4.904 16.412,2.404 16.712,2.104 16.712,0.804 16.762,0.754 17.662,0.754 17.712,0.804 17.712,2.104 18.012,2.404 18.012,6.054 17.612,6.454 12.812,6.454 12.712,6.354 12.712,5.504 12.812,5.404 12.962,5.404
GND on Top Layer "GND_L01_P029" (solid, pour order 29): 54.262,28.804 53.912,29.154 49.162,29.154 48.912,29.404 48.912,32.554 48.662,32.804 48.362,32.804 48.112,33.054 48.112,34.104 47.512,34.704 47.512,36.004 47.512,37.854 47.262,38.104 45.412,38.104 45.162,38.354 45.162,38.804 44.712,39.254 44.712,39.454 47.012,39.454 cw(c47.012,38.455) 48.012,38.454 48.012,36.354 ccw(c51.362,36.354) 51.362,33.004 53.462,33.004 cw(c53.462,32.005) 54.462,32.004 54.462,28.804
VCC_ARM on Top Layer "VCC_ARM_L01_P005" (solid, remove dead copper, pour order 5): 31.562,23.104 34.462,23.104 34.462,21.204 33.462,21.204 33.462,20.704 33.062,20.704 33.062,21.204 32.462,21.204 32.462,20.704 32.062,20.704 32.062,21.204 31.562,21.204
GND on Top Layer "GND_L01_P024" (solid, remove dead copper, pour order 24): 31.462,22.104 31.462,21.104 31.962,21.104 31.962,20.604 32.562,20.604 32.562,21.104 32.962,21.104 32.962,20.604 33.562,20.604 33.562,21.104 34.562,21.104 34.562,22.104 34.962,22.104 34.962,18.704 34.562,18.704 34.562,19.704 33.562,19.704 33.562,20.204 31.962,20.204 31.962,19.704 30.962,19.704 30.962,18.704 30.562,18.704 30.562,22.104
GPIO_VREF on Top Layer "GPIO_VREF_L01_P014" (solid, pour order 14): 34.962,23.654 34.962,22.704 34.562,22.704 34.562,23.204 32.562,23.204 32.562,23.654
VCC3.3_SYS on Top Layer "VCC3.3_SYS_L01_P022" (solid, remove dead copper, pour order 22): 35.062,23.104 35.962,23.104 35.962,22.704 35.062,22.704
GND on Top Layer "GND_L01_P021" (solid, remove dead copper, pour order 21): 33.462,18.604 33.462,18.204 32.062,18.204 32.062,18.604
GND on Top Layer "GND_L01_P019" (solid, remove dead copper, pour order 19): 33.462,22.604 33.462,22.204 32.062,22.204 32.062,22.604
VCC1.8_SYS on Top Layer "VCC1.8_SYS_L01_P015" (solid, pour order 15): 29.462,19.704 29.462,21.604 29.012,21.604 29.012,19.704
VCC1.8_SYS on Top Layer "VCC1.8_SYS_L01_P001" (solid, remove dead copper, pour order 1): 32.462,23.654 32.462,23.204 30.562,23.204 30.562,23.654
VCC3.3_SYS on Top Layer "VCC3.3_SYS_L01_P012" (solid, remove dead copper, pour order 12): 35.062,23.104 35.962,23.104 35.962,22.704 35.062,22.704
VCC1.8_SYS on Top Layer "VCC1.8_SYS_L01_P010" (solid, remove dead copper, pour order 10): 32.962,17.604 32.962,17.154 32.062,17.154 32.062,17.604
VCC3.3_SYS on Top Layer "VCC3.3_SYS_L01_P009" (solid, remove dead copper, pour order 9): 33.962,17.604 33.962,17.154 33.062,17.154 33.062,17.604
VCC1.8_SYS on Top Layer "VCC1.8_SYS_L01_P008" (solid, remove dead copper, pour order 8): 34.962,17.154 34.962,18.104 34.062,18.104 34.062,17.154
GND on Top Layer "GND_L01_P007" (solid, remove dead copper, pour order 7): 33.462,18.604 33.462,18.204 32.062,18.204 32.062,18.604
GND on Top Layer "GND_L01_P004" (solid, remove dead copper, pour order 4): 33.462,22.604 33.462,22.204 32.062,22.204 32.062,22.604
VCCA1.8_SYS on Top Layer "VCCA1.8_SYS_L01_P003" (solid, remove dead copper, pour order 3): 29.462,18.104 30.962,18.104 30.962,17.154 29.012,17.154 29.012,19.604 29.462,19.604
VCCA1.8_SYS on Top Layer "VCCA1.8_SYS_L01_P002" (solid, remove dead copper, pour order 2): 30.462,23.654 30.462,23.104 31.462,23.104 31.462,22.604 31.462,22.204 30.562,22.204 30.562,22.704 29.012,22.704 29.012,23.204 29.012,23.654
DRAM_VCC1.1 on Top Layer "DRAM_VCC1.1_L01_P000" (solid, remove dead copper, pour order 0): 36.512,23.654 36.512,17.154 35.062,17.154 35.062,17.604 36.062,17.604 36.062,23.204 35.062,23.204 35.062,23.654
GND on Layer 7 "GND_L08_P062" (solid, pour order 62): 47.005,0.354 ccw(c47.005,1.362) 48.012,1.362 48.012,3.408 cw(c51.416,3.408) 51.416,6.812 53.466,6.812 ccw(c53.466,7.808) 54.462,7.808 54.462,32.008 ccw(c53.462,32.008) 53.462,33.008 51.312,33.008 cw(c51.312,36.308) 48.012,36.308 48.012,38.458 ccw(c47.012,38.458) 47.012,39.458 7.816,39.458 ccw(c7.816,38.454) 6.812,38.454 6.812,36.408 cw(c3.412,36.408) 3.412,33.008 1.264,33.008 ccw(c1.264,32.107) 0.362,32.107 0.362,27.608 6.112,27.608 6.112,19.908 0.362,19.908 0.362,7.812 ccw(c1.366,7.812) 1.366,6.808 3.412,6.808 cw(c3.412,3.408) 6.812,3.408 6.812,1.354 ccw(c7.812,1.354) 7.812,0.354
ENET_VDD on Layer 7 "Layer 7-ENET_VDD" (solid, remove dead copper, pour order 56): 43.162,29.004 43.362,28.804 45.612,28.804 45.762,28.954 45.762,32.054 45.762,32.454 45.512,32.454 45.262,32.704 45.262,34.004 45.812,34.554 45.812,34.754 42.762,37.804 42.762,38.454 42.662,38.554 42.412,38.554 42.312,38.454 42.312,38.104 42.312,37.854 42.112,37.654 40.912,37.654 40.762,37.504 40.762,36.554 40.762,32.804 40.762,32.104 41.962,30.904 45.012,30.904 45.212,30.704 45.212,29.404 45.112,29.304 43.862,29.304 43.762,29.404 43.762,29.754 43.662,29.854 43.262,29.854 43.162,29.754
ENET_VDDAL on Layer 7 "ENET_VDDAL_L08_P040" (solid, remove dead copper, pour order 40): 37.212,39.149 37.212,35.954 36.662,35.404 36.662,35.104 37.012,34.754 37.012,32.504 37.212,32.304 38.912,30.604 41.362,30.604 41.612,30.354 44.162,30.354 44.412,30.104 44.412,29.504 44.512,29.404 45.012,29.404 45.112,29.504 45.112,30.604 44.912,30.804 41.862,30.804 41.562,31.104 40.662,32.004 40.662,37.504 40.512,37.654 39.312,37.654 39.162,37.804 39.162,39.054 39.068,39.149
ETH_VDDIO on Layer 7 "Layer 7-ETH_VDDIO" (solid, remove dead copper, pour order 60): 41.962,27.804 46.162,27.804 47.762,29.404 47.762,38.733 ccw(c47.012,38.455) 47.012,39.254 39.262,39.254 39.262,37.904 39.412,37.754 42.062,37.754 42.212,37.904 42.212,38.504 42.362,38.654 42.712,38.654 42.862,38.504 42.862,37.854 45.912,34.804 45.912,34.504 45.362,33.954 45.362,32.754 45.562,32.554 45.662,32.554 45.862,32.354 45.862,28.904 45.662,28.704 43.312,28.704 43.062,28.954 43.062,29.854 43.162,29.954 43.762,29.954 43.862,29.854 43.862,29.504 43.962,29.404 44.212,29.404 44.312,29.504 44.312,30.104 44.162,30.254 41.562,30.254 41.312,30.504 40.412,30.504 40.262,30.354 40.262,29.504
GND on Bottom Layer "GND_L10_P038" (solid, pour order 38): 39.1,35.55 38.85,35.3 37.4,35.3 37.4,33.8 41.375,33.8 41.375,37.4 39.1,37.4
GND on Bottom Layer "NONET_L04_P-001" (solid, pour order 82): 24.47,16.971 25.87,16.971 25.87,16.528 25.727,16.37 25.727,15.55 24.673,15.55 24.673,14.385 24.908,14.15 25.513,14.15 26.383,15.021 26.732,15.021 26.732,14.426 26.307,14 24.232,14 24.232,16.733
GND on Bottom Layer "GND_L10_P041" (solid, pour order 41): 37.012,0.504 37.662,1.154 37.662,2.954 38.112,3.404 40.612,3.404 40.862,3.154 40.862,2.704 41.112,2.454 45.362,2.454 45.962,1.854 47.012,1.854 47.412,2.254 47.412,4.804 47.812,5.204 47.812,6.604 47.412,7.004 45.662,7.004 45.462,7.204 45.462,8.754 45.762,9.054 46.912,9.054 47.262,9.404 47.262,9.954 47.012,10.204 46.162,10.204 45.912,10.454 45.912,11.354 46.112,11.554 49.262,11.554 49.962,12.254 53.012,12.254 54.162,13.404 54.162,27.604 52.862,28.904 48.962,28.904 48.262,29.604 48.262,31.304 48.762,31.804 48.762,34.254 49.553,33.556 50.422,33.148 51.409,33.004 52.434,33.004 53.462,32.999 53.467,32.999 cw(c53.467,32.004) 54.462,32.004 54.462,7.808 cw(c53.462,7.808) 53.462,6.808 52.462,6.808 52.462,6.799 51.412,6.799 50.437,6.663 49.497,6.213 48.564,5.263 48.156,4.394 48.012,3.408 48.012,1.354 cw(c46.912,1.354) 46.912,0.254 37.012,0.254
GND on Bottom Layer "GND_L10_P042" (solid, pour order 42): 11.812,0.504 11.412,0.904 11.412,1.804 11.012,2.204 8.012,2.204 7.512,2.704 7.512,5.404 6.462,6.454 6.062,6.454 5.762,6.754 5.762,7.054 5.562,7.254 1.612,7.254 0.912,7.954 0.912,12.954 1.162,13.204 1.162,15.304 1.462,15.604 4.712,15.604 4.912,15.804 4.912,16.654 5.262,17.004 7.962,17.004 9.612,15.354 11.062,15.354 11.612,15.904 14.662,15.904 15.062,16.304 15.062,18.254 14.812,18.504 13.512,18.504 12.912,19.104 12.912,21.704 13.412,22.204 15.712,22.204 16.862,21.054 18.612,21.054 19.112,21.554 ccw(c18.812,21.854) 19.112,22.154 16.612,24.654 7.812,24.654 7.512,24.954 7.512,26.054 7.862,26.404 9.662,26.404 10.162,26.904 10.162,29.804 9.412,30.554 9.412,38.654 10.012,39.254 10.012,39.449 7.811,39.449 ccw(c7.811,38.451) 6.812,38.451 6.812,36.399 6.668,35.415 6.261,34.546 5.328,33.596 4.387,33.146 3.412,32.999 1.362,33.001 1.26,33.001 ccw(c1.26,32.103) 0.362,32.103 0.362,27.604 6.112,27.604 6.112,19.904 0.362,19.904 0.362,7.796 ccw(c1.354,7.796) 1.354,6.804 3.416,6.804 4.402,6.661 5.271,6.253 6.221,5.32 6.671,4.38 6.812,3.396 6.812,1.346 ccw(c7.812,1.346) 7.812,0.346 11.812,0.346
GND on Layer 2 "GND_L03_P069" (solid, pour order 69): 47.005,0.351 ccw(c47.005,1.358) 48.012,1.358 48.012,3.404 cw(c51.416,3.404) 51.416,6.808 53.466,6.808 ccw(c53.466,7.804) 54.462,7.804 54.462,32.004 ccw(c53.462,32.004) 53.462,33.004 51.312,33.004 cw(c51.312,36.304) 48.012,36.304 48.012,38.454 ccw(c47.012,38.454) 47.012,39.454 7.816,39.454 ccw(c7.816,38.451) 6.812,38.451 6.812,36.404 cw(c3.412,36.404) 3.412,33.004 1.264,33.004 ccw(c1.264,32.103) 0.362,32.103 0.362,27.604 6.112,27.604 6.112,19.904 0.362,19.904 0.362,7.808 ccw(c1.366,7.808) 1.366,6.804 3.412,6.804 cw(c3.412,3.404) 6.812,3.404 6.812,1.351 ccw(c7.812,1.351) 7.812,0.351
VCCA1.8_SYS on Layer 2 "VCCA1.8_SYS_L03_P068" (solid, remove dead copper, pour order 68): 29.462,19.454 29.862,19.854 29.862,22.454 29.512,22.804 29.512,23.004 29.712,23.204 31.012,23.204 31.262,22.954 34.262,22.954 34.912,23.604 35.412,23.604 36.812,22.204 36.812,21.204 36.812,21.004 37.162,20.654 37.362,20.654 37.512,20.504 37.512,19.804 35.562,17.854 32.162,17.854 31.662,17.354 29.662,17.354 29.462,17.554
VCC1.8_SYS on Layer 2 "VCC1.8_SYS_L03_P039" (solid, remove dead copper, pour order 39): 29.062,22.454 28.912,22.604 28.262,22.604 28.062,22.804 28.062,23.604 28.162,23.704 32.812,23.704 33.012,23.504 33.012,23.304 32.862,23.154 31.262,23.154 31.112,23.304 29.662,23.304 29.412,23.054 29.412,22.754 29.762,22.404 29.762,20.004 29.612,19.854 29.312,19.854 29.062,20.104
VCC3.3_SYS on Layer 4 "VCC3.3_SYS_L05_P066" (solid, remove dead copper, pour order 66): 7.812,0.351 47.005,0.351 ccw(c47.005,1.358) 48.012,1.358 48.012,3.304 cw(c51.516,3.304) 51.516,6.808 53.466,6.808 ccw(c53.466,7.804) 54.462,7.804 54.462,32.001 ccw(c53.459,32.001) 53.459,33.004 51.412,33.004 cw(c51.412,36.408) 48.009,36.408 48.009,38.458 ccw(c47.012,38.458) 47.012,39.454 7.816,39.454 ccw(c7.816,38.451) 6.812,38.451 6.812,36.354 cw(c3.462,36.354) 3.462,33.004 1.264,33.004 ccw(c1.264,32.103) 0.362,32.103 0.362,27.604 6.112,27.604 6.112,19.704 0.362,19.704 0.362,7.808 ccw(c1.366,7.808) 1.366,6.804 3.412,6.804 cw(c3.412,3.404) 6.812,3.404 6.812,1.351 ccw(c7.812,1.351)
DRAM_VCC1.1 on Layer 4 "DRAM_VCC1.1_L05_P051" (solid, pour order 51): 10.762,27.704 10.762,19.304 17.512,12.554 50.662,12.554 52.762,14.654 52.762,26.204 51.412,27.554 36.062,27.554 36.062,23.104 34.462,23.104 34.462,20.304 32.412,18.254 20.212,18.254 13.162,25.304 13.162,27.454 12.912,27.704
VCC_ARM on Layer 4 "VCC_ARM_L05_P046" (solid, pour order 46): 32.262,18.404 20.212,18.404 16.762,21.854 13.312,25.304 13.312,27.454 12.912,27.854 10.762,27.854 10.762,29.904 10.762,35.204 11.112,35.554 12.762,35.554 13.162,35.154 13.162,32.504 14.062,31.604 15.812,31.604 24.312,23.104 34.262,23.104 34.262,20.404
VCC5.0_SYS on Layer 4 "Layer 4-VCC5.0_SYS" (solid, remove dead copper, pour order 64): 0.362,27.604 6.112,27.604 6.112,17.854 11.662,12.304 11.662,5.454 13.412,3.704 40.162,3.704 43.412,6.954 45.422,6.954 45.617,7.149 45.617,8.46 45.422,8.654 41.522,8.654 39.372,6.504 17.462,6.504 16.312,7.654 16.312,13.567 10.686,19.228 10.712,19.254 10.712,35.304 11.062,35.654 12.862,35.654 13.162,35.354 13.162,32.704 14.062,31.804 15.462,31.804 20.112,27.154 21.662,27.154 21.912,27.404 21.912,31.904 19.512,34.304 19.362,34.454 19.362,35.804 19.112,36.054 19.112,36.454 19.512,36.854 19.512,39.454 7.812,39.454 ccw(c7.812,38.454) 6.812,38.454 6.812,36.504 cw(c3.313,36.504) 3.312,33.004 1.264,33.004 ccw(c1.264,32.103) 0.362,32.103
GPIO_VREF on Layer 4 "GPIO_VREF_L05_P050" (solid, pour order 50): 33.062,23.204 33.062,27.154 30.462,29.754 22.312,29.754 22.062,30.004 22.062,31.954 19.512,34.504 19.512,35.804 19.212,36.104 19.212,36.404 19.362,36.554 19.512,36.554 19.962,36.554 20.662,35.854 20.662,34.704 23.812,31.554 31.412,31.554 35.912,27.054 35.912,23.204
VCC1.8_SYS on Layer 4 "VCC1.8_SYS_L05_P049" (solid, pour order 49): 24.612,23.204 32.962,23.204 32.962,27.054 30.462,29.554 22.312,29.554 22.062,29.304 22.062,25.754
VCC1.8_SYS on Layer 5 "VCC1.8_SYS_L06_P078" (solid, remove dead copper, pour order 78): 7.812,0.351 47.005,0.351 ccw(c47.005,1.358) 48.012,1.358 48.012,3.304 cw(c51.516,3.304) 51.516,6.808 53.466,6.808 ccw(c53.466,7.804) 54.462,7.804 54.462,32.001 ccw(c53.459,32.001) 53.459,33.004 51.412,33.004 cw(c51.412,36.408) 48.009,36.408 48.009,38.458 ccw(c47.012,38.458) 47.012,39.454 7.816,39.454 ccw(c7.816,38.451) 6.812,38.451 6.812,36.354 cw(c3.462,36.354) 3.462,33.004 1.264,33.004 ccw(c1.264,32.103) 0.362,32.103 0.362,27.604 6.112,27.604 6.112,19.704 0.362,19.704 0.362,7.808 ccw(c1.366,7.808) 1.366,6.804 3.412,6.804 cw(c3.412,3.404) 6.812,3.404 6.812,1.351 ccw(c7.812,1.351)
VCC_SOC on Layer 5 "VCC_SOC_L06_P067" (solid, remove dead copper, pour order 67): 13.362,31.454 14.012,30.804 14.012,29.804 14.762,29.054 14.762,28.954 14.762,25.055 23.912,15.904 28.312,15.904 29.512,17.104 31.412,17.104 32.062,17.754 33.462,17.754 34.162,18.454 35.362,18.454 35.762,18.854 35.762,21.954 35.512,22.204 26.562,22.204 25.662,23.104 23.862,23.104 22.462,24.504 22.462,33.704 23.762,35.004 23.762,37.054 23.562,37.254 17.662,37.254 17.412,37.004 17.412,36.004 17.162,35.754 16.362,35.754 16.112,36.004 16.112,36.604 15.462,37.254 13.562,37.254 13.362,37.054
VCC3.3_SYS on Layer 5 "VCC3.3_SYS_L06_P071" (solid, remove dead copper, pour order 71): 14.717,11.299 14.717,17.219 16.062,18.564 16.062,19.904 16.362,20.204 18.712,20.204 19.262,19.654 19.262,13.204 19.562,12.904 19.562,11.254 19.362,11.054 14.962,11.054
VCC3.3_SYS on Layer 5 "VCC3.3_SYS_L06_P054" (solid, remove dead copper, pour order 54): 28.012,21.704 27.662,22.054 27.662,22.854 27.962,23.154 34.412,23.154 34.562,23.304 34.562,23.954 34.562,27.154 36.212,28.804 36.512,28.804 36.962,28.354 36.962,23.954 37.462,23.454 37.462,18.304 37.262,18.104 36.912,17.754 33.862,17.754 33.712,17.604 33.712,17.354 33.562,17.204 33.006,17.204 32.933,17.278 32.933,17.834 33.203,18.104 33.512,18.104 33.862,18.454 35.512,18.454 35.842,18.785 35.842,22.124 35.662,22.304 34.162,22.304 33.262,21.404 32.312,21.404 31.512,22.204 29.762,22.204 29.512,21.954 29.512,21.354 29.388,21.23 28.012,21.23